# EAGLE board survey (EAGLE 8.7.0)
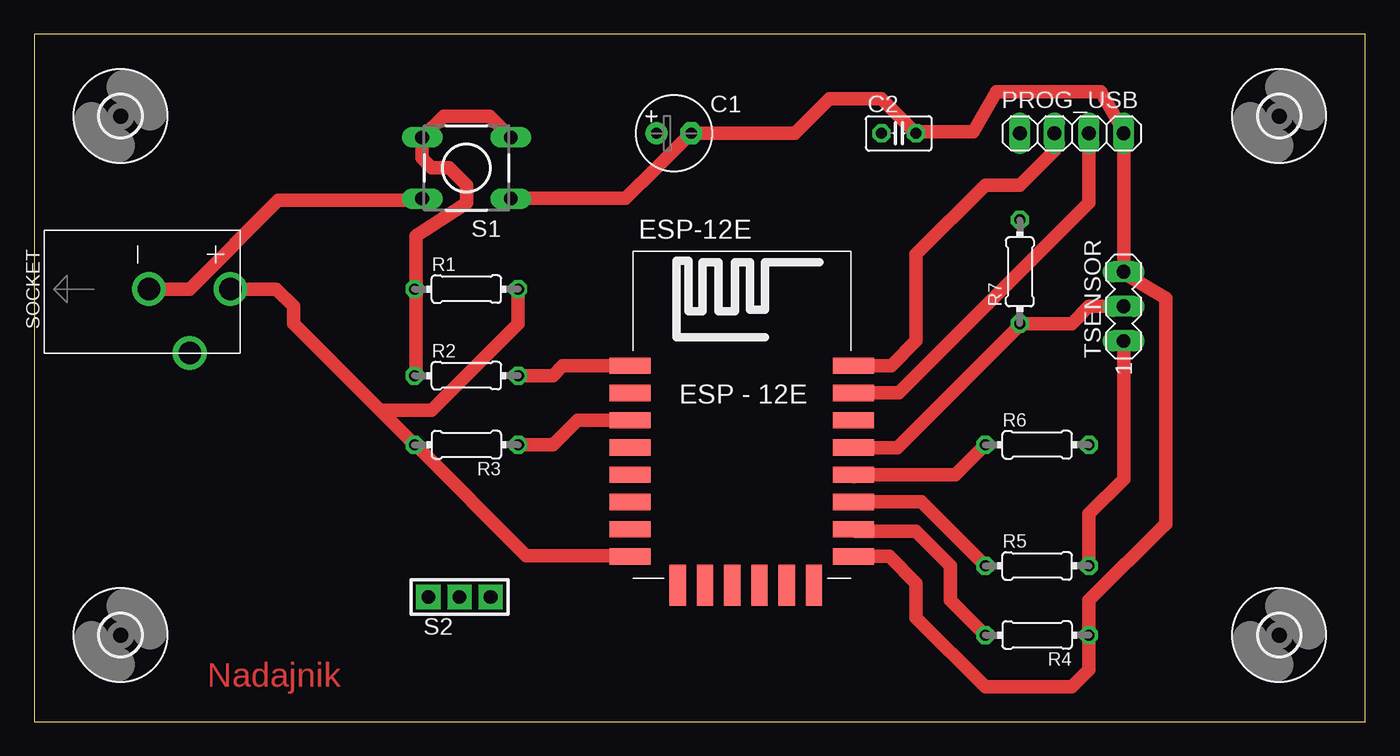
[diagram p0: board, top side]
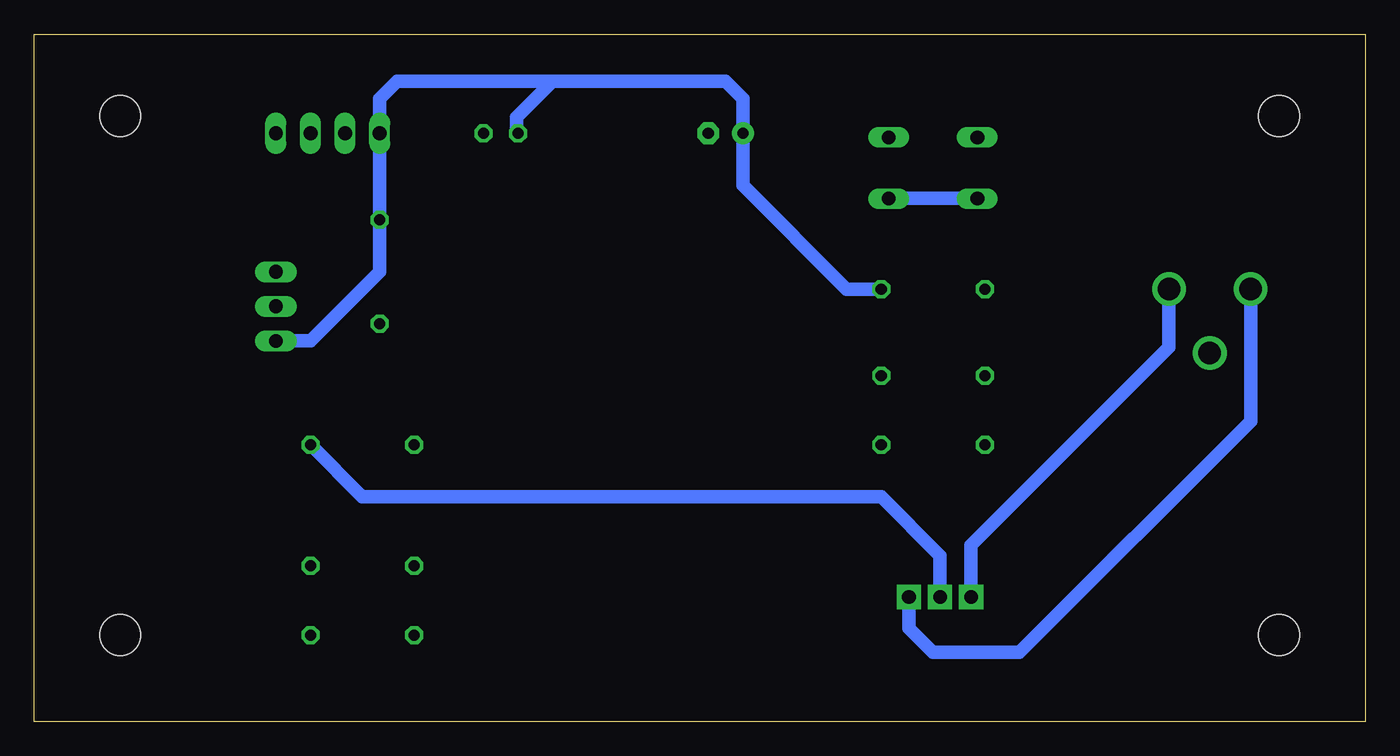
[diagram p1: board, bottom side, seen from below]

Size 97.77 x 50.47 mm. Coordinates in mm from the lower left corner, seen from the top.
Outline: 0,0 97.77,0 97.77,50.47 0,50.47 0,0
Copper layers (1*16): Top 0.035mm / dielectric 1.5mm / Bottom 0.035mm
Design rules "default": minimum track width 6mil, minimum drill 0.35mm, track to track 6mil, track to pad 6mil, pad to pad 6mil, via to via 6mil, smd to smd 6mil, copper to edge 40mil, drill to drill 6mil, minimum pad ring 10mil, minimum via ring 8mil, stop-mask expansion 4mil, vias tented up to drill 0mil, thermal gap 10mil
Net classes: 0 default: clearance 0.205 mm

## Footprints (pad centres in the part's own frame; a part is rotated, then mirrored left to right if it is on the bottom)
E2,5-6 = drill 0.813 pad 1.6: + -1.27,0 | drill 0.813 pad 1.6 octagon: - 1.27,0
C025-025X050 = drill 0.813 octagon: 1 -1.27,0; 2 1.27,0
ESP12E-SMD = smd 3 x 1.2: ADC -8.3,3.8; CH_PD -8.3,1.8; GND 8.1,-8.2; GPIO0 8.1,-2.2; GPIO2 8.1,-4.2; GPIO4 8.1,-0.2; GPIO5 8.1,1.8; GPIO12 -8.3,-4.2; GPIO13 -8.3,-6.2; GPIO14 -8.3,-2.2; GPIO15 8.1,-6.2; GPIO16 -8.3,-0.2; RESET -8.3,5.8; RXD0 8.1,3.8; TXD0 8.1,5.8; VCC -8.3,-8.2 | smd 1.2 x 3: CS0 -4.8,-10.3; GPIO9 -0.8,-10.3; GPIO10 1.2,-10.3; MISO -2.8,-10.3; MOSI 3.2,-10.3; SCLK 5.2,-10.3
3,0 = hole 3: 0,0
1X04 = drill 1.016 long: 1 -3.81,0; 2 -1.27,0; 3 1.27,0; 4 3.81,0
0204/7 = drill 0.813 octagon: 1 -3.81,0; 2 3.81,0
DTS-6 = drill 1 long: 1 -3.25,2.25; 2 3.25,2.25; 3 -3.25,-2.25; 4 3.25,-2.25
CON3 = drill 1 pad 1.778 square: P$1 -2.794,0.254; P$2 -0.508,0.254; P$3 1.778,0.254
PJ-102AH = drill 1.65: 1 0,-3; 2 0,3; 3 -4.7,0
MA03-1 = drill 1.016 long: 1 -2.54,0; 2 0,0; 3 2.54,0

## Placement (x,y rotation side)
C1  100u  [E2,5-6]  46.99,43.18 0 top
C2  100n  [C025-025X050]  63.5,43.18 0 top
ESP-12E  [ESP12E-SMD]  52.07,20.32 0 top
H1  MOUNT-HOLE3.0  [3,0]  6.35,6.35 0 top
H2  MOUNT-HOLE3.0  [3,0]  6.35,44.45 0 top
H3  MOUNT-HOLE3.0  [3,0]  91.44,44.45 0 top
H4  MOUNT-HOLE3.0  [3,0]  91.44,6.35 0 top
PROG_USB  [1X04]  76.2,43.18 0 top
R1  10k  [0204/7]  31.75,31.75 0 top
R2  100  [0204/7]  31.75,25.4 0 top
R3  2k2  [0204/7]  31.75,20.32 180 top
R4  2k2  [0204/7]  73.66,6.35 180 top
R5  2k2  [0204/7]  73.66,11.43 0 top
R6  2k2  [0204/7]  73.66,20.32 0 top
R7  4,7k  [0204/7]  72.39,33.02 90 top
S1  DTS-6  [DTS-6]  31.75,40.64 180 top
S2  -SWITCH  [CON3]  31.75,8.89 0 top
SOCKET  PJ-102AH  [PJ-102AH]  11.43,31.75 90 top
TSENSOR  [MA03-1]  80.01,30.48 90 top

## Library data of the parts
C1 C2 = rcl; SPICEPREFIX: C
ESP-12E = esp8266modules
H1-H4 = holes
PROG_USB = pinhead
R1-R7 = rcl; SPICEPREFIX: R
S1 = switch-tact
S2 = tango
SOCKET = connector; DIGIKEY: CP-102AH-ND
TSENSOR = con-lstb; OC_FARNELL: unknown; OC_NEWARK: unknown

## Nets
GND: C1.- C2.2 ESP-12E.GND PROG_USB.4 R4.1 S1.1 S1.2 S2.P$3 SOCKET.2 TSENSOR.3
N$1: ESP-12E.GPIO2 R5.1
N$2: ESP-12E.CH_PD R3.1
N$3: ESP-12E.TXD0 PROG_USB.2
N$4: ESP-12E.RXD0 PROG_USB.3
N$5: ESP-12E.GPIO4 R7.1 TSENSOR.2
N$6: R6.2 S2.P$2
N$7: ESP-12E.GPIO15 R4.2
N$8: ESP-12E.RESET R2.2
N$9: R1.1 R2.1 S1.3 S1.4
N$10: ESP-12E.GPIO0 R6.1
VCC: C1.+ C2.1 ESP-12E.VCC PROG_USB.1 R1.2 R3.2 R5.2 R7.2 S2.P$1 SOCKET.1 TSENSOR.1

## Tracks (layer width: path | path; a pad name or v marks a point on that pad's centre or on a via)
GND
  Top 0.991: 8.53,31.7 SOCKET.2 11.43,31.75 17.93,38.25 28.5,38.25 S1.2 | 45.62,40.59 45.7,40.66 | 45.7,40.66 C1.- | S1.1 35.05,38.41 43.44,38.41 45.7,40.66 | 77.57,6.4 R4.1 | 48.31,43.28 C1.- | C1.- 55.88,43.18 58.42,45.72 62.23,45.72 C2.2 64.77,43.28 68.99,43.28 70.66,46.23 78.33,46.23 80.01,43.28 PROG_USB.4 TSENSOR.3 80.01,32.92 83.11,31.09 83.11,14.48 83.06,14.48 77.47,8.89 R4.1 | R4.1 77.47,3.81 76.2,2.54 69.85,2.54 64.77,7.62 64.77,10.16 62.81,12.12 ESP-12E.GND
  Bottom 0.991: S1.2 28.65,38.41 34.9,38.41 S1.1 | SOCKET.2 8.43,22.05 25.4,5.08 31.75,5.08 33.53,6.86 S2.P$3
N$1
  Top 0.991: 60.81,16 60.2,16 ESP-12E.GPIO2 65.16,16.12 R5.1
N$2
  Top 0.991: 43.28,22.1 43.74,22.1 ESP-12E.CH_PD 39.9,22.12 38.1,20.32 R3.1 35.66,20.42
N$3
  Top 0.991: 60.2,26.21 ESP-12E.TXD0 62.95,26.12 64.77,27.94 64.77,34.29 69.85,39.37 72.39,39.37 74.93,41.91 PROG_USB.2 74.83,43.13
N$4
  Top 0.991: ESP-12E.RXD0 60.2,24.23 60.81,24.23 60.91,24.13 63.5,24.13 77.47,38.1 PROG_USB.3
N$5
  Top 0.991: 72.39,29.26 R7.1 | R7.1 72.39,29.11 63.4,20.12 ESP-12E.GPIO4 | R7.1 76.2,29.21 77.47,30.48 TSENSOR.2
N$6
  Bottom 0.991: S2.P$2 31.24,12.19 35.56,16.51 73.66,16.51 R6.2
N$7
  Top 0.991: 60.81,14.02 60.2,14.02 ESP-12E.GPIO15 60.32,13.97 64.77,13.97 67.31,11.43 67.31,8.89 R4.2
N$8
  Top 0.991: 35.66,25.45 R2.2 38.1,25.4 38.82,26.12 ESP-12E.RESET 43.74,26.06
N$9
  Top 0.991: R2.1 28.04,25.45 28.04,31.7 R1.1 28.04,31.85 28.04,35.66 31.6,37.95 31.75,38.1 31.75,39.37 30.48,40.64 29.21,40.64 28.5,41.35 S1.4 30.06,44.45 33.44,44.45 S1.3
N$10
  Top 0.991: 60.2,17.98 ESP-12E.GPIO0 67.65,18.12 R6.1
VCC
  Top 0.991: 28.04,20.42 R3.2 | ESP-12E.VCC 43.74,12.19 36.12,12.19 28.04,20.27 R3.2 | SOCKET.1 14.48,31.7 14.53,31.75 17.78,31.75 19.05,30.48 19.05,29.21 25.4,22.86 | R1.2 35.56,29.21 29.21,22.86 25.4,22.86 | 25.4,22.86 R3.2 | TSENSOR.1 80.01,17.78 77.47,15.24 R5.2
  Bottom 0.152: 72.39,43.28 PROG_USB.1
  Bottom 0.991: C2.1 62.33,43.28 62.33,44.35 59.69,46.99 | 80.01,28.04 TSENSOR.1 77.47,27.94 72.39,33.02 R7.2 PROG_USB.1 72.39,45.72 71.12,46.99 59.69,46.99 | R1.2 38.1,31.75 45.72,39.37 C1.+ 45.72,45.72 46.99,46.99 59.69,46.99 | SOCKET.1 14.43,27.48 28.96,12.95 S2.P$1

## Text on the board
Top: Nadajnik